# Altium PCB ECU V1.0 B.PcbDoc
Units mm, origin at the board's own origin, x right, y up, seen from the top; angles counter-clockwise.
Board outline 100 x 100 mm, 4 copper layers (Top Layer, Int1 (GND), Int2 (PWR), Bottom Layer), stack 1.519 mm thick; 4 components, 0 nets, 4 pads, 0 vias.
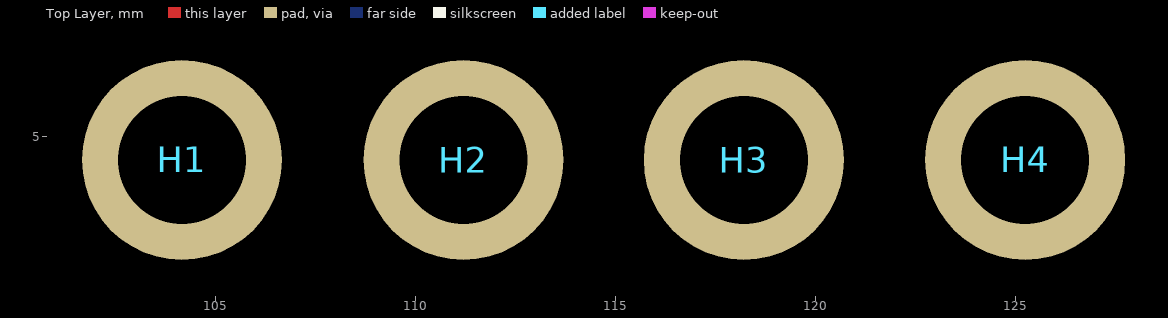
[diagram p0: Top Layer view]
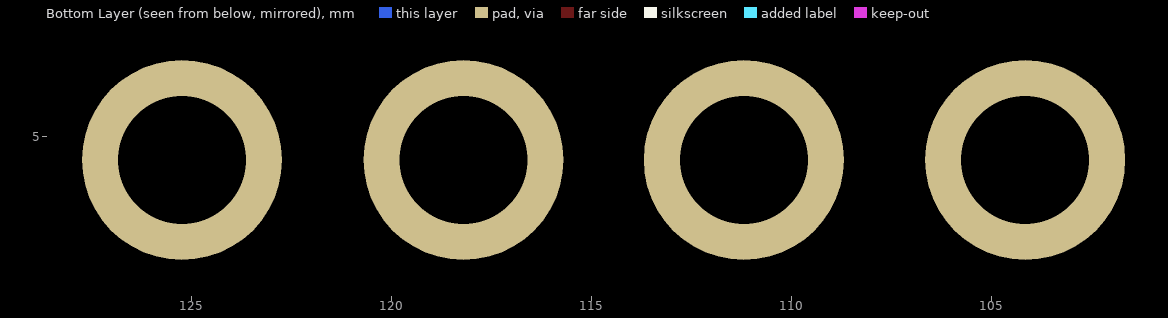
[diagram p1: Bottom Layer view, seen from below]

## Layer stack, top to bottom
Top Solder: solder mask 0.0254, SM-001, Dk 4
Top Layer: signal copper 0.035
Dielectric 1: prepreg 0.1295, PP-017, Dk 4.3
Int1 (GND): signal copper 0.035
Dielectric 3: core 1.12, Core-039, Dk 4.8
Int2 (PWR): signal copper 0.035
Dielectric 5: prepreg 0.1295, PP-017, Dk 4.3
Bottom Layer: signal copper 0.035
Bottom Solder: solder mask 0.0254, SM-001, Dk 4

## Board outline
0,5 0,95 cw(c5,95) 5,100 77.5,100 77.5,94 92,94 92,100 95,100 cw(c95,95) 100,95 100,5 cw(c95,5) 95,0 5,0 cw(c5,5)

## Design rules (kind name [scope] priority, off if disabled: settings)
AcuteAngle [All] p1: minimum=3.00000000000000E+0001 checktracksonly=TRUE
BoardOutlineClearance [All] p1: gap=0.254 ignorepadtopadclearanceinfootprint=FALSE
Clearance Clearance_Z100 [InNetClass('Z100')] p1: gap=0.1 ignorepadtopadclearanceinfootprint=FALSE
Clearance Clearance_Z90 [InNetClass('Z90')] p2: gap=0.1 ignorepadtopadclearanceinfootprint=FALSE
Clearance Clearance_U16 [InNetClass('Z90') vs InComponent('U16')] p3: gap=0.013 ignorepadtopadclearanceinfootprint=FALSE
Clearance [All] p4: gap=0.1 ignorepadtopadclearanceinfootprint=FALSE
DiffPairsRouting [InDifferentialPairClass('Z100')] p1: maxlimit=0.127 minlimit=0.127 mostfreqgap=0.127 toplayer_minwidth=0.108 toplayer_maxwidth=0.108 toplayer_prefwidth=0.108 midlayer1_minwidth=0.056 midlayer1_maxwidth=0.056 midlayer1_prefwidth=0.056 midlayer2_minwidth=0.056 midlayer2_maxwidth=0.056 midlayer2_prefwidth=0.056 bottomlayer_minwidth=0.108 bottomlayer_maxwidth=0.108 bottomlayer_prefwidth=0.108 impedanceprofiledriven=TRUE impedanceprofileid={AEBA453F-1EC9-4BE8-9BF2-125C71D1FDEB} impedanceprofilevalue=100.000000 maxuncoupledlength=12.7
FabricationTestpoint [All] p1: side=3 testpointundercomponent=TRUE minsize=1 maxsize=3 preferedsize=1 minholesize=0 maxholesize=1 preferedholesize=0.3 testpointgrid=0.025 allowsidetop=TRUE allowsidebottom=TRUE usegrid=TRUE gridtolerance=0
HoleSize [All] p1: absolutevalues=TRUE maxlimit=6.2 minlimit=0.15 maxpercent=80.000 minpercent=20.000
MatchedLengths MatchedLengths_DIFF [InDifferentialPairClass('All Differential Pairs')] p1: tolerance=0.1 checknetsindiffpair=TRUE checkdiffpairvsdiffpair=FALSE checkxsignals=FALSE checkothers=FALSE
MinimumAnnularRing [All] p1: minimumring=0.1
MinimumSolderMaskSliver [All] p1: minsoldermaskwidth=0.005
NetAntennae [InNet('AC1')and InNet('AC2') and InNet('AC1_A')and InNet('NetBR1_1')and InNet('NetBR1_2')] p1: netantennaetolerance=80
PolygonConnect PolygonConnect_13 [All vs IsNamedPolygon('NONET_L-01_P-001') Or IsNamedPolygon('NONET_L-01_P-001') Or IsNamedPolygon('NONET_L-01_P-001') Or IsNamedPolygon('NONET_L-01_P-001') Or IsNamedPolygon('NONET_L-01_P-001')] p1: connectstyle=Direct reliefconductorwidth=0.254 reliefentries=4 polygonreliefangle="90 Angle" airgapwidth=0.254
PolygonConnect PolygonConnect_12 [All vs IsNamedPolygon('NONET_L-01_P-001')] p2: connectstyle=Direct reliefconductorwidth=0.254 reliefentries=4 polygonreliefangle="90 Angle" airgapwidth=0.254
PolygonConnect PolygonConnect_11 [All vs IsNamedPolygon('GND_BOT_PLANE')] p3: connectstyle=Direct reliefconductorwidth=0.254 reliefentries=4 polygonreliefangle="90 Angle" airgapwidth=0.254
PolygonConnect PolygonConnect_10 [All vs IsNamedPolygon('SW')] p4: connectstyle=Direct reliefconductorwidth=0.254 reliefentries=4 polygonreliefangle="90 Angle" airgapwidth=0.254
PolygonConnect PolygonConnect_9 [All vs IsNamedPolygon('3V3_L01_P019') Or IsNamedPolygon('3V3_L01_P020') Or IsNamedPolygon('5V_L01_P000') Or IsNamedPolygon('5V_L01_P018') Or IsNamedPolygon('NETC35_2_L01_P013') Or IsNamedPolygon('NETFB1_1_L01_P001') Or IsNamedPolygon('NETFB2_1_L01_P002') Or IsNamedPolygon('NETQ6_1_L01_P014') Or IsNamedPolygon('VBAT_L01_P021') Or IsNamedPolygon('VBAT_L01_P025') Or IsNamedPolygon('VBUS_A_L01_P024') Or IsNamedPolygon('VBUS_L01_P022') Or IsNamedPolygon('VBUS_L01_P023') Or IsNamedPolygon('VD+_L01_P003') Or IsNamedPolygon('VD-_L01_P004') Or IsNamedPolygon('VSYS_L01_P015') Or IsNamedPolygon('VSYS_L01_P016') Or IsNamedPolygon('VSYS_L01_P017')] p5: connectstyle=Direct reliefconductorwidth=0.254 reliefentries=4 polygonreliefangle="90 Angle" airgapwidth=0.254
PolygonConnect PolygonConnect_8 [All vs IsNamedPolygon('5V_L01_P000') Or IsNamedPolygon('NETFB1_1_L01_P001') Or IsNamedPolygon('NETFB2_1_L01_P002') Or IsNamedPolygon('VD+_L01_P003') Or IsNamedPolygon('VD-_L01_P004')] p6: connectstyle=Direct reliefconductorwidth=0.254 reliefentries=4 polygonreliefangle="90 Angle" airgapwidth=0.254
PolygonConnect PolygonConnect_7 [All vs IsNamedPolygon('NETFB1_1_L01_P001') Or IsNamedPolygon('NETFB2_1_L01_P002')] p7: connectstyle=Direct reliefconductorwidth=0.254 reliefentries=4 polygonreliefangle="90 Angle" airgapwidth=0.254
PolygonConnect PolygonConnect_6 [All vs IsNamedPolygon('5V_L01_P000')] p8: connectstyle=Direct reliefconductorwidth=0.254 reliefentries=4 polygonreliefangle="90 Angle" airgapwidth=0.254
PolygonConnect PolygonConnect_5 [All vs IsNamedPolygon('5V_L01_P000')] p9: connectstyle=Relief reliefconductorwidth=0.254 reliefentries=4 polygonreliefangle="90 Angle" airgapwidth=0.254
PolygonConnect PolygonConnect_4 [All vs IsNamedPolygon('AC1_A_L01_P002') Or IsNamedPolygon('AC1_L01_P000') Or IsNamedPolygon('AC2_L01_P001') Or IsNamedPolygon('GND_L01_P006') Or IsNamedPolygon('GND_AMP_TOP') Or IsNamedPolygon('NETBR1_1_L01_P004') Or IsNamedPolygon('NETBR1_2_L01_P010') Or IsNamedPolygon('VIN_L01_P005') Or IsNamedPolygon('GND_L02_P007') Or IsNamedPolygon('GND_MIC_L1')] p10: connectstyle=Direct reliefconductorwidth=0.254 reliefentries=4 polygonreliefangle="90 Angle" airgapwidth=0.254
PolygonConnect PolygonConnect_3 [All vs IsNamedPolygon('3V3_L01_P010') Or IsNamedPolygon('5V_L01_P013') Or IsNamedPolygon('GND_L01_P011') Or IsNamedPolygon('NETD1_2_L01_P004') Or IsNamedPolygon('VIN_L01_P007') Or IsNamedPolygon('VUSB_FIL_L01_P003') Or IsNamedPolygon('VUSB_L01_P000') Or IsNamedPolygon('GND_L02_P012') Or IsNamedPolygon('VUSB_L02_P001')] p11: thpad.connectstyle=Relief thpad.reliefconductorwidth=0.254 thpad.reliefentries=4 thpad.polygonreliefangle="90 Angle" thpad.airgapwidth=0.254 smdpad.connectstyle=Direct smdpad.reliefconductorwidth=0.254 smdpad.reliefentries=4 smdpad.polygonreliefangle="90 Angle" smdpad.airgapwidth=0.254 via.connectstyle=Relief via.reliefconductorwidth=0.254 via.reliefentries=4 via.polygonreliefangle="90 Angle" via.airgapwidth=0.254
PolygonConnect PolygonConnect_2 [All vs IsNamedPolygon('3V3_L01_P010') Or IsNamedPolygon('5V_L01_P009') Or IsNamedPolygon('GND_L01_P011') Or IsNamedPolygon('NETD1_2_L01_P004') Or IsNamedPolygon('VIN_L01_P007') Or IsNamedPolygon('VUSB_FIL_L01_P003') Or IsNamedPolygon('VUSB_L01_P000') Or IsNamedPolygon('GND_L02_P012') Or IsNamedPolygon('VUSB_L02_P001')] p12: thpad.connectstyle=Relief thpad.reliefconductorwidth=0.254 thpad.reliefentries=4 thpad.polygonreliefangle="90 Angle" thpad.airgapwidth=0.254 smdpad.connectstyle=Direct smdpad.reliefconductorwidth=0.254 smdpad.reliefentries=4 smdpad.polygonreliefangle="90 Angle" smdpad.airgapwidth=0.254 via.connectstyle=Relief via.reliefconductorwidth=0.254 via.reliefentries=4 via.polygonreliefangle="90 Angle" via.airgapwidth=0.254
PolygonConnect PolygonConnect_1 [All vs IsNamedPolygon('3V3_L01_P010') Or IsNamedPolygon('5V_L01_P009') Or IsNamedPolygon('GND_L01_P011') Or IsNamedPolygon('NETD1_2_L01_P004') Or IsNamedPolygon('VIN_L01_P007') Or IsNamedPolygon('VUSB_FIL_L01_P003') Or IsNamedPolygon('VUSB_L01_P000') Or IsNamedPolygon('GND_L02_P012') Or IsNamedPolygon('VUSB_L02_P001')] p13: thpad.connectstyle=Relief thpad.reliefconductorwidth=0.254 thpad.reliefentries=4 thpad.polygonreliefangle="90 Angle" thpad.airgapwidth=0.254 smdpad.connectstyle=Direct smdpad.reliefconductorwidth=0.254 smdpad.reliefentries=4 smdpad.polygonreliefangle="90 Angle" smdpad.airgapwidth=0.254 via.connectstyle=Relief via.reliefconductorwidth=0.254 via.reliefentries=4 via.polygonreliefangle="90 Angle" via.airgapwidth=0.254
PolygonConnect [All] p14: connectstyle=Relief reliefconductorwidth=0.254 reliefentries=4 polygonreliefangle="90 Angle" airgapwidth=0.15
RoutingVias [All] p1: holewidth=0.3 width=0.6 viastyle="Through Hole" minholewidth=0.3 minwidth=0.6 maxholewidth=0.7 maxwidth=1
SMDEntry [All] p1: side=TRUE corner=TRUE anyangle=TRUE
SMDNeckDown [All] p1: percent=1000.000
SMDToCorner [All] p1: distance=59055
SMDToPlane [All] p1: distance=59055
SilkToSilkClearance [All] p1: silktosilkclearance=0.1
SilkToSolderMaskClearance [IsPad] p1: minsilkscreentomaskgap=0.1 clearancetoexposedcopper=TRUE
SolderMaskExpansion [All] p1: expansion=0.1 istentingtop=FALSE
UnConnectedPin [All] p1 off:
Width [All] p1: maxlimit=2 minlimit=0.15 preferedwidth=0.5 midlayer1_maxwidth=0.254 midlayer1_prefwidth=0.254 midlayer2_maxwidth=0.254 midlayer2_prefwidth=0.254 minimp=50.000000 maximp=50.000000 favimp=50.000000
23 further rules are at their usual default settings.

## Components (designator, comment, footprint, x,y, rotation, side; value= is the part's Value field where it differs from the comment)
H1 "Mounting Hole" PTH_3.2X5 104.164,4.418 r0 top
H2 "Mounting Hole" PTH_3.2X5 111.2,4.418 r0 top
H3 "Mounting Hole" PTH_3.2X5 118.21,4.418 r0 top
H4 "Mounting Hole" PTH_3.2X5 125.246,4.418 r0 top

## Footprints (in the part's own frame and the unit in brackets; to place one, negate y for a bottom-side part, rotate by r counter-clockwise, add the part's x,y. Pads: shape width x height; smd on the part's side, far side on the other; paste and mask are expansions set on the pad)
PTH_3.2X5 [mm] "PTH 3.2mm drill 5mm ring"
  round 5 hole 3.2 paste-10: 1(0,0)

## Part data
H1 H2 H3 H4: library part MECHANICALS_MOUNT_PTH, "Mounting Hole, Plated"

## Nets (pads, with @x,y where several pads share a name; then routed paths per layer and width w, separated by ;. In a path a pad name is that pad's centre, name@x,y a point inside that pad or via, vN(x,y) a via of type N, cw(c..) or ccw(c..) an arc to the next point about the centre after c; other vN are vias at no path point)
pads on no net: H1.1 H2.1 H3.1 H4.1

## Silkscreen, mask and mechanical layers (free items; w line width, h text height)
Top Assembly:
  circle w0.013: c58.42,-4.46 r0.254
  circle w0.013: c13.97,-4.46 r1.587
  circle w0.013: c55.88,-4.46 r0.254
  circle w0.013: c63.5,-4.46 r0.254
  circle w0.013: c60.96,-4.46 r0.254
  circle w0.013: c53.34,-4.46 r0.254
  circle w0.013: c50.8,-4.46 r0.254
  circle w0.013: c45.72,-4.46 r0.254
  circle w0.013: c43.18,-4.46 r0.254
  circle w0.013: c40.64,-4.46 r0.254
  circle w0.013: c38.1,-4.46 r0.254
  circle w0.013: c27.94,-4.46 r0.254
  circle w0.013: c33.02,-4.46 r0.254
  circle w0.013: c30.48,-4.46 r0.254
  circle w0.013: c35.56,-4.46 r0.254
  circle w0.013: c66.07,0.62 r1.587
  circle w0.013: c66.07,28.56 r1.587
  circle w0.013: c63.5,43.8 r0.254
  circle w0.013: c60.96,43.8 r0.254
  circle w0.013: c55.88,43.8 r0.254
  circle w0.013: c58.42,43.8 r0.254
  circle w0.013: c53.34,43.8 r0.254
  circle w0.013: c50.8,43.8 r0.254
  circle w0.013: c48.26,43.8 r0.254
  circle w0.013: c45.72,43.8 r0.254
  circle w0.013: c41.686,43.8 r0.254
  circle w0.013: c39.146,43.8 r0.254
  circle w0.013: c36.606,43.8 r0.254
  circle w0.013: c34.066,43.8 r0.254
  circle w0.013: c28.986,43.8 r0.254
  circle w0.013: c26.446,43.8 r0.254
  circle w0.013: c23.906,43.8 r0.254
  circle w0.013: c21.366,43.8 r0.254
  circle w0.013: c18.826,43.8 r0.254
  circle w0.013: c15.27,43.8 r1.587
  lines w0.013: 31.571,43.55 ccw(c31.526,43.8) 31.78,43.8